# Altium PCB FPAA_minidev.PcbDoc
Units mm, origin at the board's own origin, x right, y up, seen from the top; angles counter-clockwise.
Board outline 152.4 x 101.6 mm, 20 copper layers (F.Cu, F.Mask, B.Cu, B.Mask, In1.Cu, F.SilkS, In2.Cu, B.SilkS, F.Adhes, B.Adhes, F.Paste, B.Paste, Dwgs.User, Cmts.User, Eco1.User, Eco2.User, Edge.Cuts, Margin, B.CrtYd, F.CrtYd); 17 components, 58 nets, 144 pads, 52 vias.
Unrouted connection lines stored in the file: 6.
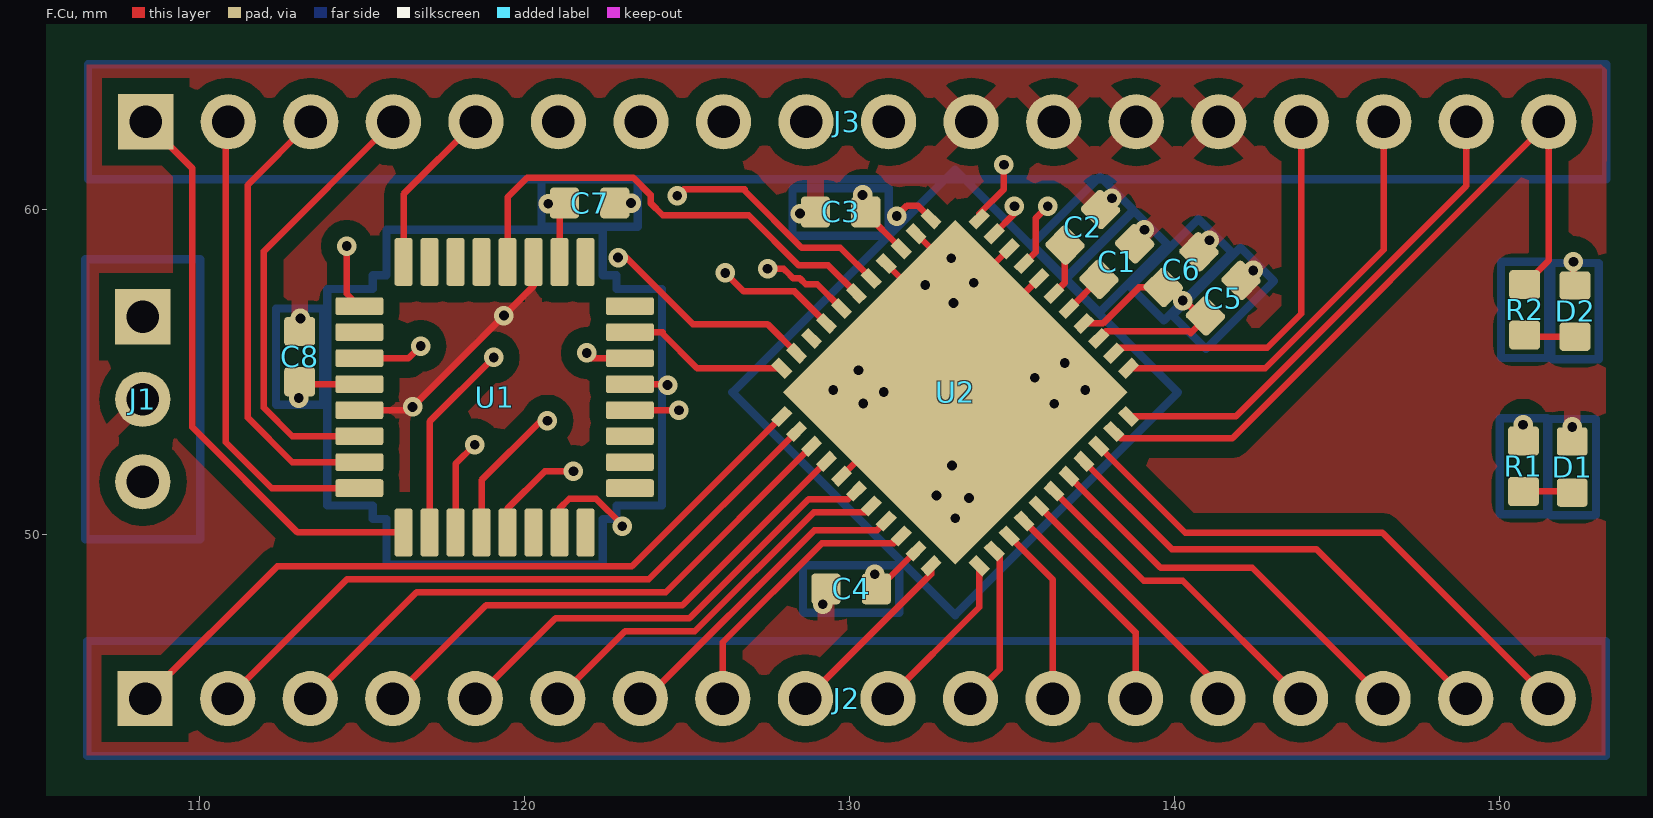
[diagram p0: F.Cu view]
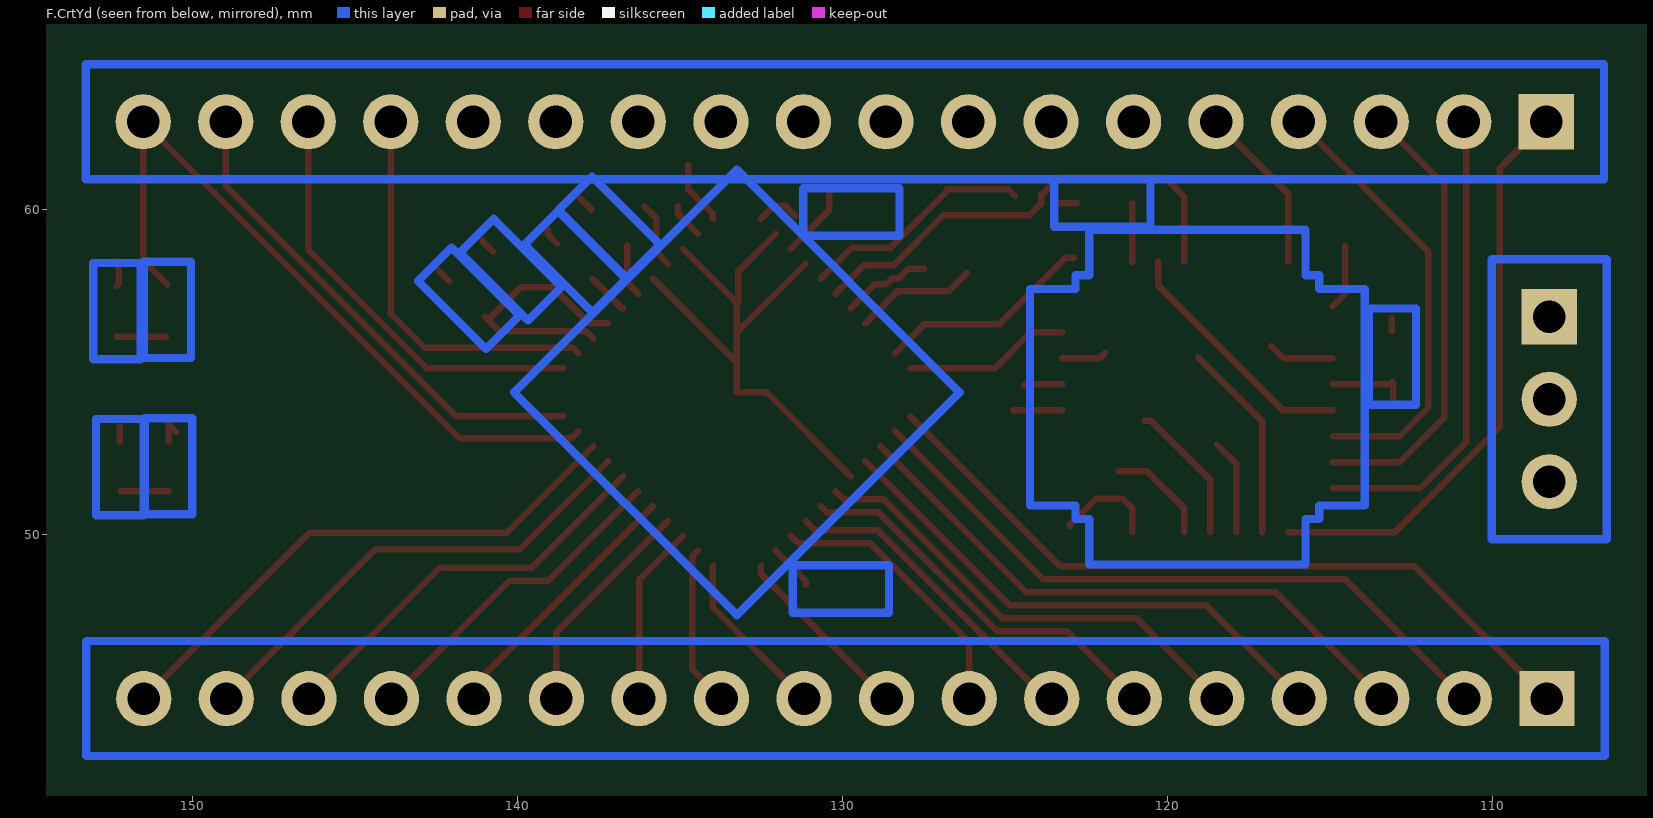
[diagram p1: F.CrtYd view, seen from below]
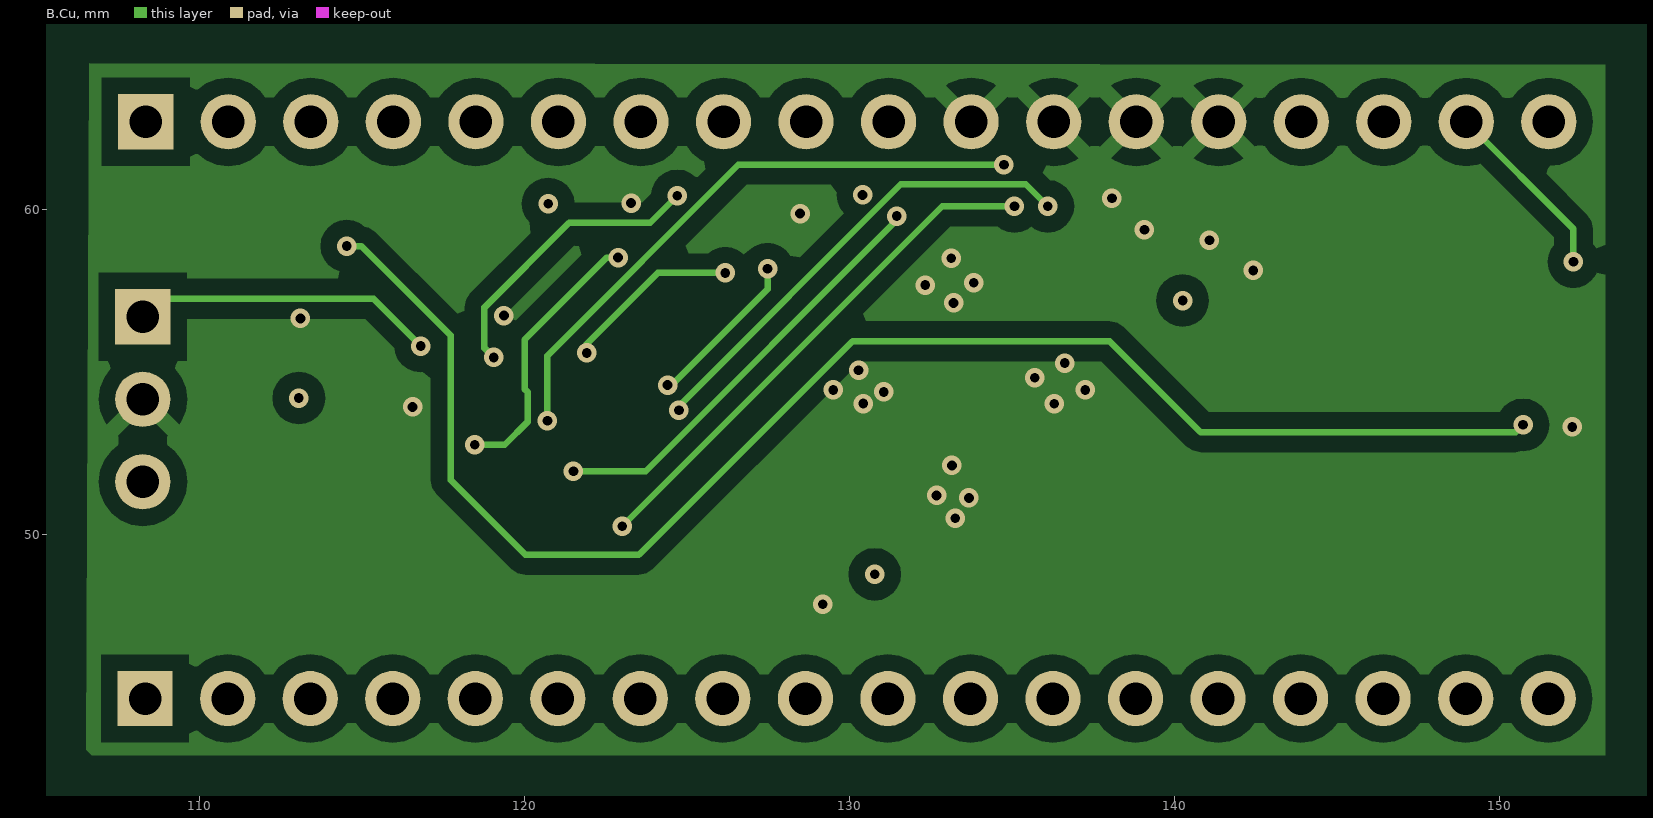
[diagram p2: B.Cu]
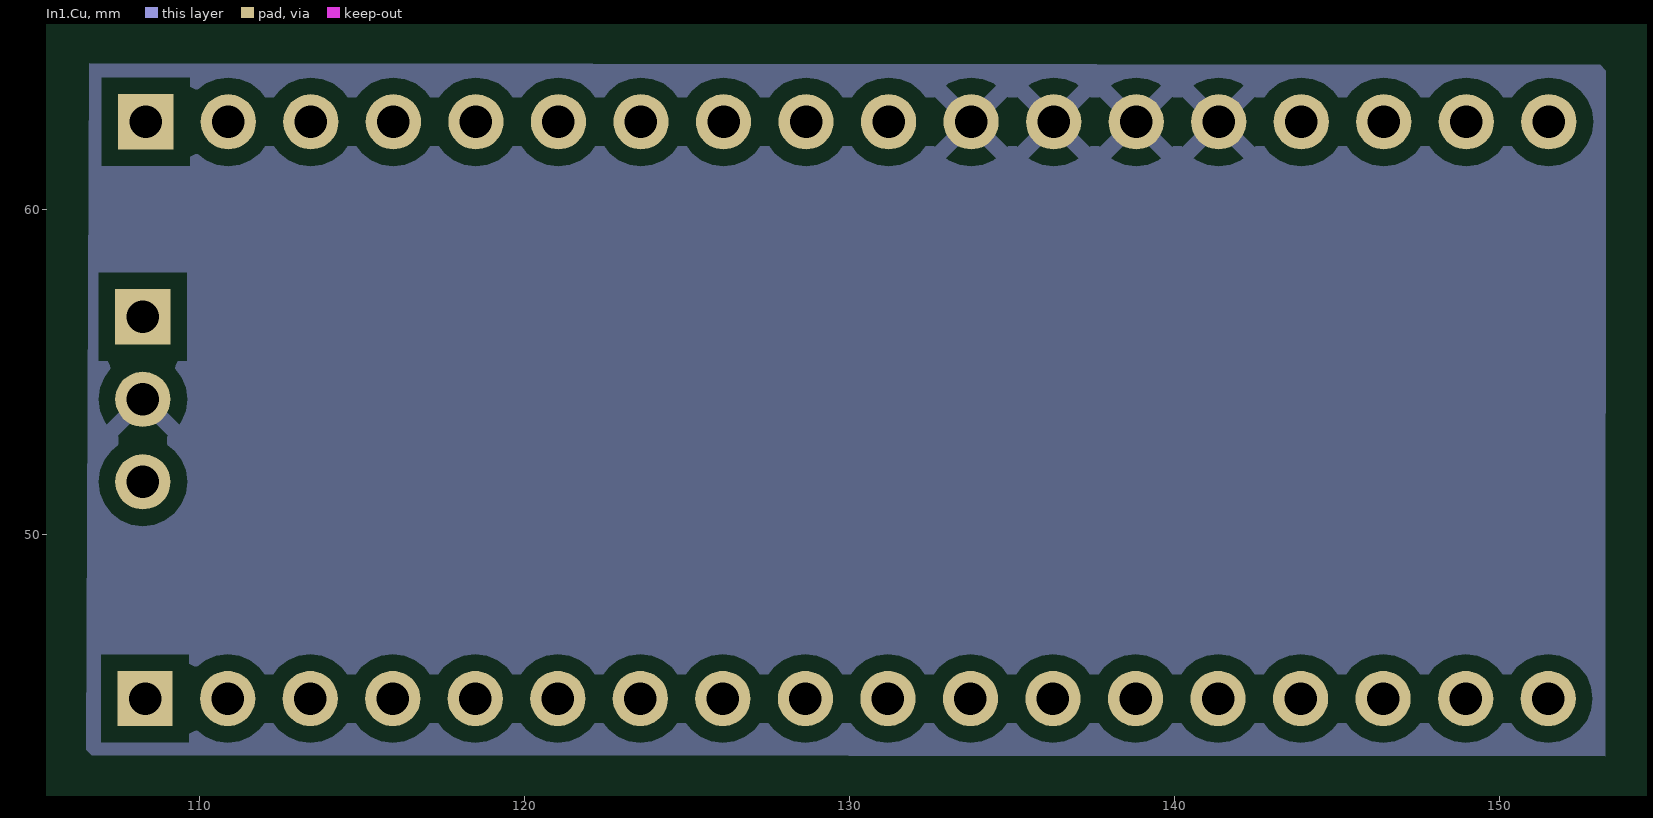
[diagram p3: In1.Cu]
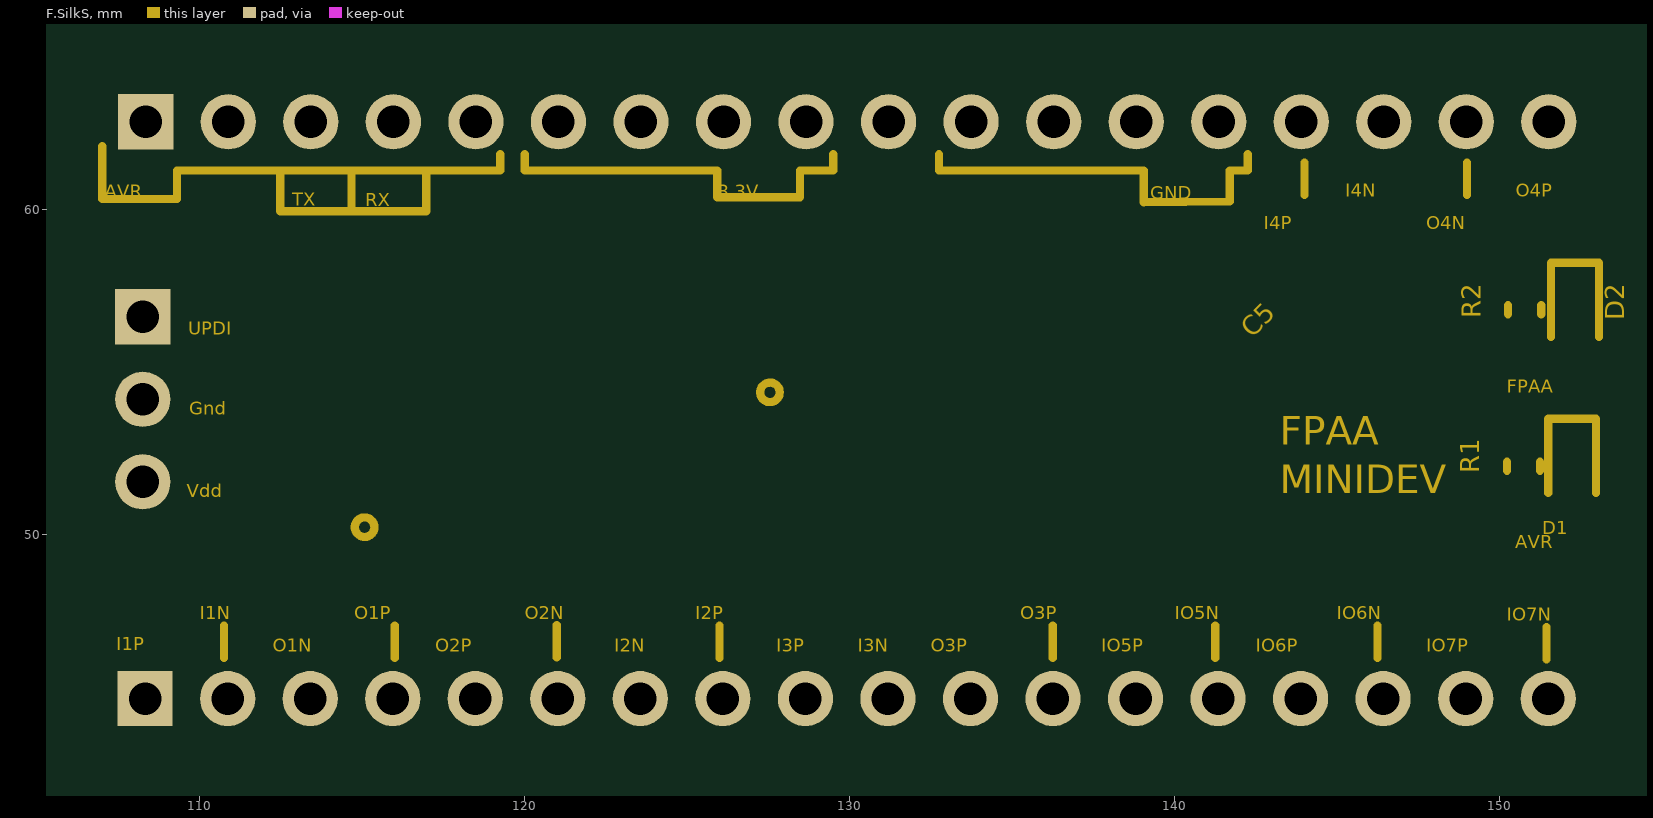
[diagram p4: F.SilkS]
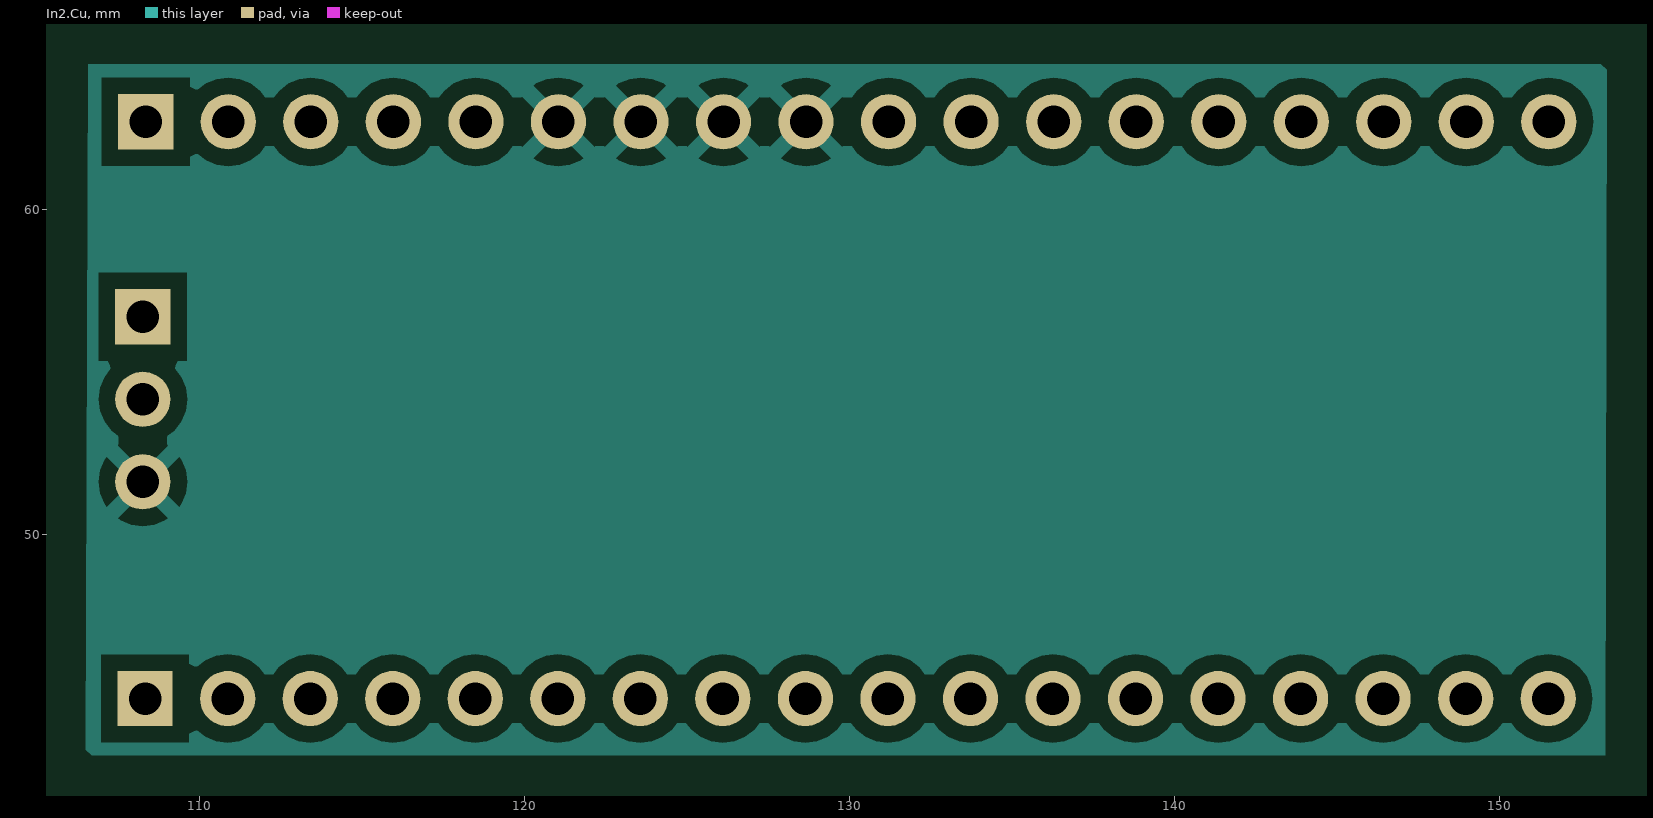
[diagram p5: In2.Cu]
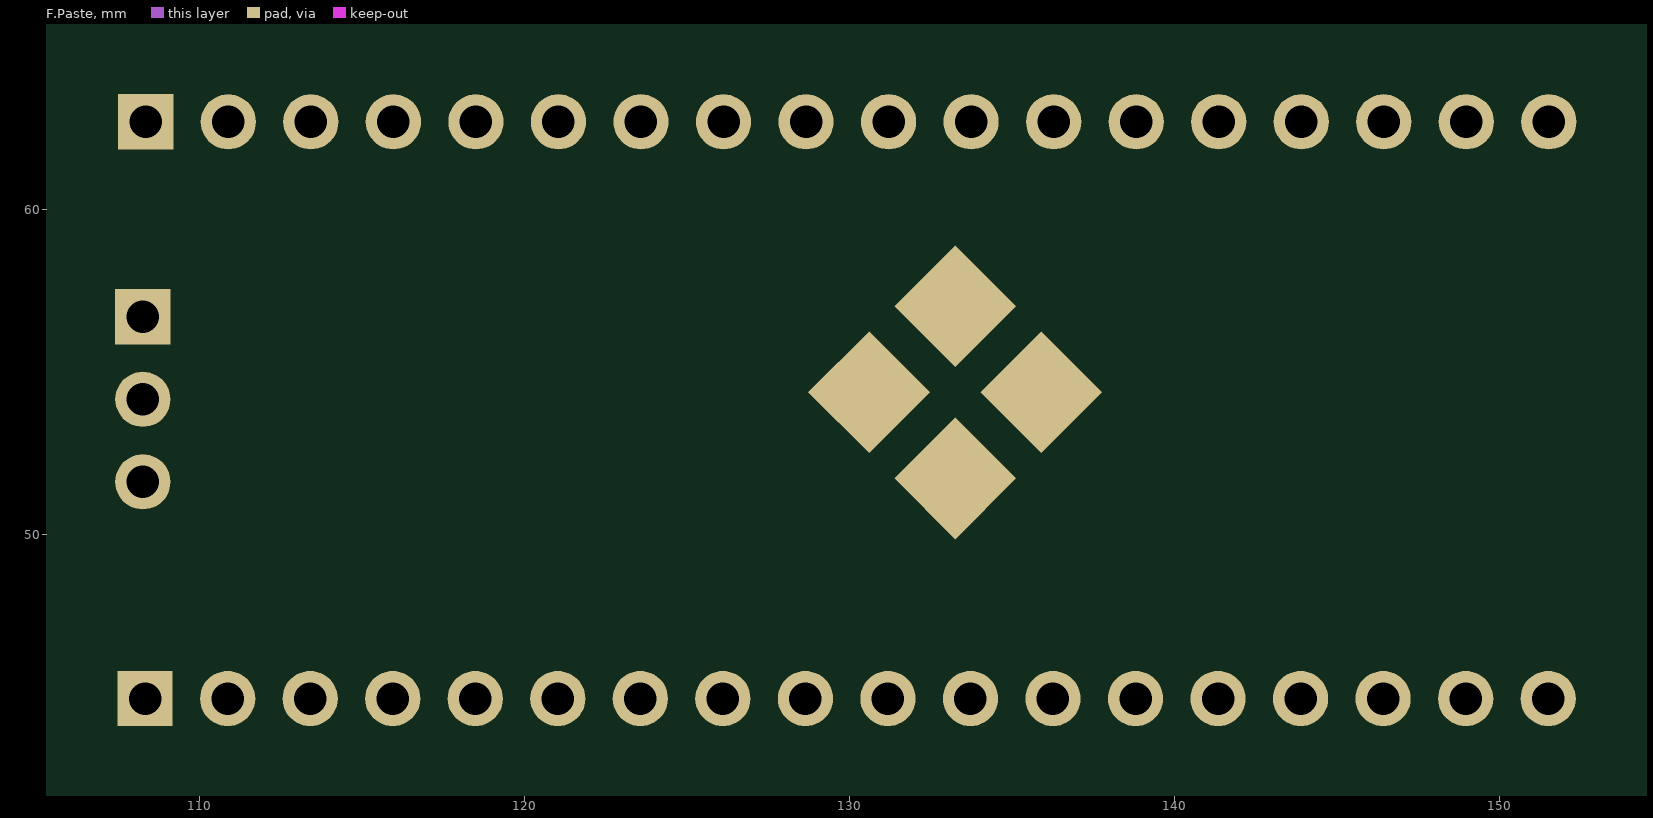
[diagram p6: F.Paste]
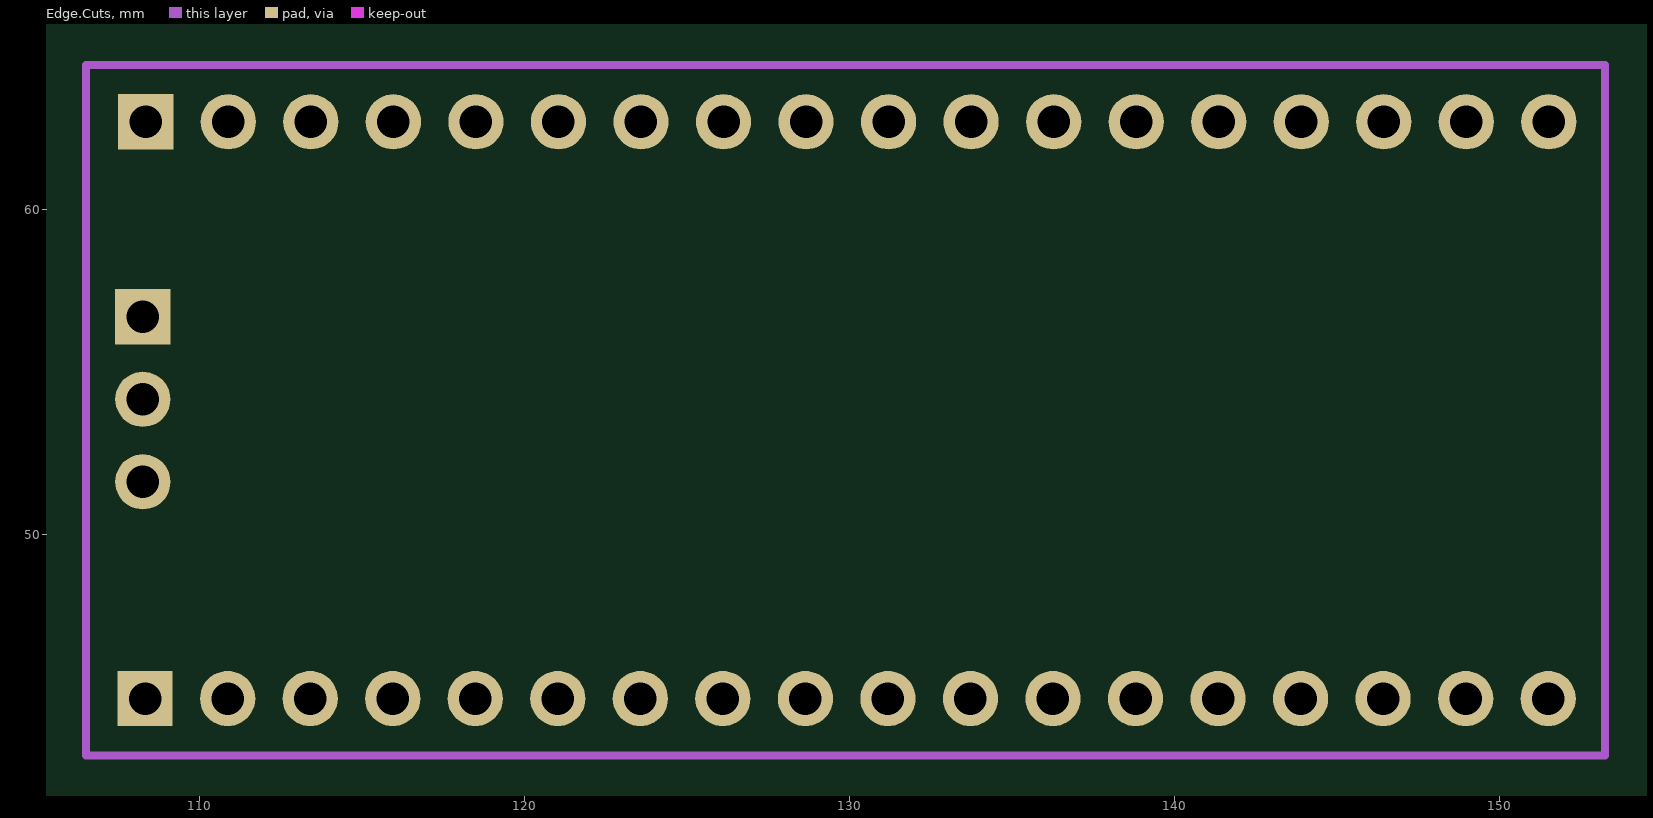
[diagram p7: Edge.Cuts]

## Layer stack, top to bottom
Top Solder: solder mask 0.0102, Solder Resist, Dk 3.5
F.Cu: signal copper 0.0356
Dielectric 1: dielectric 0.32, FR-4, Dk 4.8
F.Mask: signal copper 0.0356
Dielectric2: dielectric 0.32, FR-4, Dk 4.8
B.Cu: signal copper 0.0356
Dielectric3: dielectric 0.32, FR-4, Dk 4.8
B.Mask: signal copper 0.0356
Dielectric4: dielectric 0.32, FR-4, Dk 4.8
In1.Cu: signal copper 0.0356
Dielectric5: dielectric 0.32, FR-4, Dk 4.8
F.SilkS: signal copper 0.0356
Dielectric6: dielectric 0.32, FR-4, Dk 4.8
In2.Cu: signal copper 0.0356
Dielectric7: dielectric 0.32, FR-4, Dk 4.8
B.SilkS: signal copper 0.0356
Dielectric8: dielectric 0.32, FR-4, Dk 4.8
F.Adhes: signal copper 0.0356
Dielectric9: dielectric 0.32, FR-4, Dk 4.8
B.Adhes: signal copper 0.0356
Dielectric10: dielectric 0.32, FR-4, Dk 4.8
F.Paste: signal copper 0.0356
Dielectric11: dielectric 0.32, FR-4, Dk 4.8
B.Paste: signal copper 0.0356
Dielectric12: dielectric 0.32, FR-4, Dk 4.8
Dwgs.User: signal copper 0.0356
Dielectric13: dielectric 0.32, FR-4, Dk 4.8
Cmts.User: signal copper 0.0356
Dielectric14: dielectric 0.32, FR-4, Dk 4.8
Eco1.User: signal copper 0.0356
Dielectric15: dielectric 0.32, FR-4, Dk 4.8
Eco2.User: signal copper 0.0356
Dielectric16: dielectric 0.32, FR-4, Dk 4.8
Edge.Cuts: signal copper 0.0356
Dielectric17: dielectric 0.32, FR-4, Dk 4.8
Margin: signal copper 0.0356
Dielectric18: dielectric 0.32, FR-4, Dk 4.8
B.CrtYd: signal copper 0.0356
Dielectric19: dielectric 0.32, FR-4, Dk 4.8
F.CrtYd: signal copper 0.0356
Bottom Solder: solder mask 0.0102, Solder Resist, Dk 3.5

## Board outline
25.4,25.4 177.8,25.4 177.8,127 25.4,127

## Design rules (kind name [scope] priority, off if disabled: settings)
Clearance "Clearence 0.5_Polygon" [InNamedPolygon('F.Cu-GND') OR InNamedPolygon('B.Cu-GND') OR InNamedPolygon('In1.Cu-GND') OR InNamedPolygon('In2.Cu-+3.3V')] p1: gap=0.5 ignorepadtopadclearanceinfootprint=FALSE
MinimumSolderMaskSliver [All] p1: minsoldermaskwidth=0
PolygonConnect Polygon_In2.Cu-+3.3V_ConnectDirect [IsNamedPolygon('In2.Cu-+3.3V') vs IsVia] p1: connectstyle=Direct reliefconductorwidth=0.254 reliefentries=4 polygonreliefangle="90 Angle" airgapwidth=0.254
PolygonConnect Polygon_In2.Cu-+3.3V_ConnectRelief45 [IsNamedPolygon('In2.Cu-+3.3V') vs (IsThruPin or IsSMTPin) and (PadShape_AllLayers = 'Round')] p2: connectstyle=Relief reliefconductorwidth=0.5 reliefentries=4 polygonreliefangle="45 Angle" airgapwidth=0.5
PolygonConnect Polygon_In2.Cu-+3.3V_ConnectRelief90 [IsNamedPolygon('In2.Cu-+3.3V') vs (IsThruPin or IsSMTPin) and (PadShape_AllLayers <> 'Round')] p3: connectstyle=Relief reliefconductorwidth=0.5 reliefentries=4 polygonreliefangle="90 Angle" airgapwidth=0.5
PolygonConnect Polygon_In1.Cu-GND_ConnectDirect [IsNamedPolygon('In1.Cu-GND') vs IsVia] p4: connectstyle=Direct reliefconductorwidth=0.254 reliefentries=4 polygonreliefangle="90 Angle" airgapwidth=0.254
PolygonConnect Polygon_In1.Cu-GND_ConnectRelief45 [IsNamedPolygon('In1.Cu-GND') vs (IsThruPin or IsSMTPin) and (PadShape_AllLayers = 'Round')] p5: connectstyle=Relief reliefconductorwidth=0.5 reliefentries=4 polygonreliefangle="45 Angle" airgapwidth=0.5
PolygonConnect Polygon_In1.Cu-GND_ConnectRelief90 [IsNamedPolygon('In1.Cu-GND') vs (IsThruPin or IsSMTPin) and (PadShape_AllLayers <> 'Round')] p6: connectstyle=Relief reliefconductorwidth=0.5 reliefentries=4 polygonreliefangle="90 Angle" airgapwidth=0.5
PolygonConnect Polygon_B.Cu-GND_ConnectDirect [IsNamedPolygon('B.Cu-GND') vs IsVia] p7: connectstyle=Direct reliefconductorwidth=0.254 reliefentries=4 polygonreliefangle="90 Angle" airgapwidth=0.254
PolygonConnect Polygon_B.Cu-GND_ConnectRelief45 [IsNamedPolygon('B.Cu-GND') vs (IsThruPin or IsSMTPin) and (PadShape_AllLayers = 'Round')] p8: connectstyle=Relief reliefconductorwidth=0.5 reliefentries=4 polygonreliefangle="45 Angle" airgapwidth=0.5
PolygonConnect Polygon_B.Cu-GND_ConnectRelief90 [IsNamedPolygon('B.Cu-GND') vs (IsThruPin or IsSMTPin) and (PadShape_AllLayers <> 'Round')] p9: connectstyle=Relief reliefconductorwidth=0.5 reliefentries=4 polygonreliefangle="90 Angle" airgapwidth=0.5
PolygonConnect Polygon_F.Cu-GND_ConnectDirect [IsNamedPolygon('F.Cu-GND') vs IsVia] p10: connectstyle=Direct reliefconductorwidth=0.254 reliefentries=4 polygonreliefangle="90 Angle" airgapwidth=0.254
PolygonConnect Polygon_F.Cu-GND_ConnectRelief45 [IsNamedPolygon('F.Cu-GND') vs (IsThruPin or IsSMTPin) and (PadShape_AllLayers = 'Round')] p11: connectstyle=Relief reliefconductorwidth=0.5 reliefentries=4 polygonreliefangle="45 Angle" airgapwidth=0.5
PolygonConnect Polygon_F.Cu-GND_ConnectRelief90 [IsNamedPolygon('F.Cu-GND') vs (IsThruPin or IsSMTPin) and (PadShape_AllLayers <> 'Round')] p12: connectstyle=Relief reliefconductorwidth=0.5 reliefentries=4 polygonreliefangle="90 Angle" airgapwidth=0.5
RoutingVias [All] p1: holewidth=0.711 width=1.27 viastyle="Through Hole" minholewidth=0.711 minwidth=1.27 maxholewidth=0.711 maxwidth=1.27
SilkToSilkClearance [All] p1: silktosilkclearance=0
SilkToSolderMaskClearance [IsPad] p1: minsilkscreentomaskgap=0 clearancetoexposedcopper=TRUE
SolderMaskExpansion [All] p1: expansion=0.102 istentingtop=FALSE
Width [All] p1: maxlimit=10 minlimit=0.254 preferedwidth=0.254 midlayer1_maxwidth=0.254 midlayer3_maxwidth=0.254 midlayer7_maxwidth=0.254 midlayer9_maxwidth=0.254 midlayer11_maxwidth=0.254 midlayer13_maxwidth=0.254 midlayer15_maxwidth=0.254 midlayer17_maxwidth=0.254 midlayer19_maxwidth=0.254 midlayer21_maxwidth=0.254 midlayer23_maxwidth=0.254 midlayer27_maxwidth=0.254 midlayer29_maxwidth=0.254 minimp=50.000000 maximp=50.000000 favimp=50.000000
27 further rules are at their usual default settings.

## Components (designator, comment, footprint, x,y, rotation, side; value= is the part's Value field where it differs from the comment)
C1 "Comment" C_0603_1608Metric#1 138.225,58.4 r45 top value=100n
C2 "Comment" C_0603_1608Metric#1 137.177,59.452 r45 top value=100n
C3 "Comment" C_0603_1608Metric#1 129.725,59.925 r180 top value=100n
C4 "Comment" C_0603_1608Metric#1 130.05,48.325 r0 top value=100n
C5 "Comment" C_0603_1608Metric#1 141.498,57.273 r225 top value=100n
C6 "Comment" C_0603_1608Metric#1 140.202,58.152 r45 top value=100n
C7 "Comment" C_0603_1608Metric#1 122,60.2 r180 top value=100n
C8 "Comment" C_0603_1608Metric#1 113.075,55.475 r90 top value=100n
D1 "Comment" LED_0603_1608Metric 152.239,52.075 r270 top value=LED
D2 "Comment" LED_0603_1608Metric 152.325,56.875 r270 top value=LED
J1 "Comment" PinHeader_1x03_P2.54mm_Vertical 108.25,56.7 r0 top value=Conn_01x03_Pin
J2 "Comment" PinHeader_1x18_P2.54mm_Vertical 108.32,44.95 r90 top value=Conn_01x18_Pin
J3 "Comment" PinHeader_1x18_P2.54mm_Vertical 108.34,62.7 r90 top value=Conn_01x18_Pin
R1 "Comment" C_0603_1608Metric#2 150.739,52.1 r90 top value=330
R2 "Comment" C_0603_1608Metric#2 150.775,56.915 r90 top value=330
U1 "Comment" TQFP-32_7x7mm_P0.8mm 119.075,54.225 r90 top value=AVR32DA32x-xPT
U2 "Comment" QFN-44-1EP_9x9mm_P0.65mm_EP7.5x7.5mm 133.25,54.375 r45 top value=AN231E04

## Footprints (in the part's own frame and the unit in brackets; to place one, negate y for a bottom-side part, rotate by r counter-clockwise, add the part's x,y. Pads: shape width x height; smd on the part's side, far side on the other; paste and mask are expansions set on the pad)
C_0603_1608Metric#1 [mm]
  rrect25% 0.9x0.95 smd paste-0.95 mask-0.95: 1(-0.775,0) 2(0.775,0)
  F.CrtYd lines w0.254: -1.48,0.73 1.48,0.73 1.48,-0.73 -1.48,-0.73 -1.48,0.73
C_0603_1608Metric#2 [mm]
  rrect25% 0.9x0.95 smd paste-0.95 mask-0.95: 1(-0.775,0) 2(0.775,0)
  F.SilkS lines w0.254: -0.141,0.51 0.141,0.51 ; -0.141,-0.51 0.141,-0.51
  F.CrtYd lines w0.254: -1.48,0.73 -1.48,-0.73 1.48,-0.73 1.48,0.73 -1.48,0.73
LED_0603_1608Metric [mm]
  rrect25% 0.875x0.95 smd paste-0.95 mask-0.95: 1(-0.787,0) 2(0.787,0)
  F.SilkS lines w0.254: 0.8,-0.735 -1.485,-0.735 -1.485,0.735 0.8,0.735
  F.CrtYd lines w0.254: 1.48,-0.73 1.48,0.73 -1.48,0.73 -1.48,-0.73 1.48,-0.73
PinHeader_1x03_P2.54mm_Vertical [mm]
  rect 1.7x1.7 hole 1 paste-2539.97 mask-1.7: 1(0,0)
  round 1.7 hole 1 paste-2539.97 mask-1.7: 2(0,-2.54) 3(0,-5.08)
  F.CrtYd lines w0.254: -1.77,-6.85 1.77,-6.85 1.77,1.77 -1.77,1.77 -1.77,-6.85
PinHeader_1x18_P2.54mm_Vertical [mm]
  rect 1.7x1.7 hole 1 paste-2539.97 mask-1.7: 1(0,0)
  round 1.7 hole 1 paste-2539.97 mask-1.7: 2(0,-2.54) 3(0,-5.08) 4(0,-7.62) 5(0,-10.16) 6(0,-12.7) 7(0,-15.24) 8(0,-17.78) 9(0,-20.32) 10(0,-22.86) 11(0,-25.4) 12(0,-27.94) 13(0,-30.48) 14(0,-33.02) 15(0,-35.56) 16(0,-38.1) 17(0,-40.64) 18(0,-43.18)
  F.CrtYd lines w0.254: -1.77,1.78 -1.77,-44.95 1.77,-44.95 1.77,1.78 -1.77,1.78
QFN-44-1EP_9x9mm_P0.65mm_EP7.5x7.5mm [mm]
  rect 0.6x0.33 smd paste-0.6 mask-0.6: 1(-4.3,3.25) 2(-4.3,2.6) 3(-4.3,1.95) 4(-4.3,1.3) 5(-4.3,0.65) 6(-4.3,0) 7(-4.3,-0.65) 8(-4.3,-1.3) 9(-4.3,-1.95) 10(-4.3,-2.6) 11(-4.3,-3.25) 23(4.3,-3.25) 24(4.3,-2.6) 25(4.3,-1.95) 26(4.3,-1.3) 27(4.3,-0.65) 28(4.3,0) 29(4.3,0.65) 30(4.3,1.3) 31(4.3,1.95) 32(4.3,2.6) 33(4.3,3.25)
  rect 0.33x0.6 smd paste-0.6 mask-0.6: 12(-3.25,-4.3) 13(-2.6,-4.3) 14(-1.95,-4.3) 15(-1.3,-4.3) 16(-0.65,-4.3) 17(0,-4.3) 18(0.65,-4.3) 19(1.3,-4.3) 20(1.95,-4.3) 21(2.6,-4.3) 22(3.25,-4.3) 34(3.25,4.3) 35(2.6,4.3) 36(1.95,4.3) 37(1.3,4.3) 38(0.65,4.3) 39(0,4.3) 40(-0.65,4.3) 41(-1.3,4.3) 42(-1.95,4.3) 43(-2.6,4.3) 44(-3.25,4.3)
  rect 7.5x7.5 smd paste-7.5 mask-7.5: 45(0,0)
  rect 2.65x2.65 on Mid13 paste-2.65 mask-2.65: Un1(-1.875,1.875) Un2(-1.875,-1.875) Un3(1.875,1.875) Un4(1.875,-1.875)
  F.CrtYd lines w0.254: -4.85,4.85 -4.85,-4.85 4.85,-4.85 4.85,4.85 -4.85,4.85
TQFP-32_7x7mm_P0.8mm [mm]
  rrect25% 1.475x0.55 smd paste-1.475 mask-1.475: 1(-4.163,2.8) 2(-4.163,2) 3(-4.163,1.2) 4(-4.163,0.4) 5(-4.163,-0.4) 6(-4.163,-1.2) 7(-4.163,-2) 8(-4.163,-2.8) 17(4.163,-2.8) 18(4.163,-2) 19(4.163,-1.2) 20(4.163,-0.4) 21(4.163,0.4) 22(4.163,1.2) 23(4.163,2) 24(4.163,2.8)
  rrect25% 0.55x1.475 smd paste-1.475 mask-1.475: 9(-2.8,-4.163) 10(-2,-4.163) 11(-1.2,-4.163) 12(-0.4,-4.163) 13(0.4,-4.163) 14(1.2,-4.163) 15(2,-4.163) 16(2.8,-4.163) 25(2.8,4.163) 26(2,4.163) 27(1.2,4.163) 28(0.4,4.163) 29(-0.4,4.163) 30(-1.2,4.163) 31(-2,4.163) 32(-2.8,4.163)
  F.CrtYd lines w0.254: -3.33,5.15 3.33,5.15 3.33,3.75 3.75,3.75 3.75,3.33 5.15,3.33 5.15,-3.33 3.75,-3.33 3.75,-3.75 3.33,-3.75 3.33,-5.15 -3.33,-5.15 -3.33,-3.75 -3.75,-3.75 -3.75,-3.33 -5.15,-3.33 -5.15,3.33 -3.75,3.33 -3.75,3.75 -3.33,3.75 -3.33,5.15

## Part data
C1 C2 C3 C4 C5 C6 C7 C8 R1 R2: library part C_0603_1608Metric, "Capacitor SMD 0603 (1608 Metric), square (rectangular) end terminal, IPC-7351 nominal, (Body size source: IPC-SM-782 page 76, https://www.pcb-3d.com/wordpress/wp-content/uploads/ipc-sm-782a_amendment_1_and_2.pdf), generated with kicad-footprint-generator", Datasheet=~
  C1 C2 C3 C4 C5 C6 C7 C8: Description="Unpolarized capacitor", ki_fp_filters=C_*
  R1 R2: Description=Resistor, ki_fp_filters=R_*
D1 D2: library part LED_0603_1608Metric, "LED SMD 0603 (1608 Metric), square (rectangular) end terminal, IPC-7351 nominal, (Body size source: http://www.tortai-tech.com/upload/download/2011102023233369053.pdf), generated with kicad-footprint-generator", Datasheet=~, Description="Light emitting diode", Sim.Pins="1=K 2=A", ki_fp_filters="LED* LED_SMD:* LED_THT:*"
J1: library part PinHeader_1x03_P2.54mm_Vertical, "Through hole straight pin header, 1x03, 2.54mm pitch, single row", Datasheet=~, Description="Generic connector, single row, 01x03, script generated", ki_fp_filters=Connector*:*_1x??_*
J2 J3: library part PinHeader_1x18_P2.54mm_Vertical, "Through hole straight pin header, 1x18, 2.54mm pitch, single row", Datasheet=~, Description="Generic connector, single row, 01x18, script generated", ki_fp_filters=Connector*:*_1x??_*
U1: library part TQFP-32_7x7mm_P0.8mm, "TQFP, 32 Pin (JEDEC MS-026 variation ABA, https://www.jedec.org/document_search?search_api_views_fulltext=MS-026, https://ww1.microchip.com/downloads/en/PackagingSpec/00000049BZ.pdf#page=656), generated with kicad-footprint-generator ipc_gullwing_generator.py", Datasheet=https://ww1.microchip.com/downloads/en/DeviceDoc/AVR32DA28-32-48-Data-Sheet-40002228B.pdf, Description="24MHz, 32kB Flash, 4kB SRAM, EEPROM with Touch Sensing, TQFP-32", ki_fp_filters=TQFP*7x7mm*P0.8mm*
U2: library part QFN-44-1EP_9x9mm_P0.65mm_EP7.5x7.5mm, "44-Lead Plastic Quad Flat, No Lead Package - 9x9 mm Body [QFN]; see section 10.3 of https://www.parallax.com/sites/default/files/downloads/P8X32A-Propeller-Datasheet-v1.4.0_0.pdf", Datasheet=https://www.parallax.com/sites/default/files/downloads/P8X32A-Propeller-Datasheet-v1.4.0_0.pdf, Description="Parallax Propeller 8 core, 32 bit, 80 MHz microcontroller, 3.3VDC, 44-pin QFN", ki_fp_filters=QFN*44*1EP*9x9mm*P0.65mm*

## Via types
v1: diameter 0.6, hole 0.3, F.Cu to B.Cu, tented both sides, 52 vias

## Nets (pads, with @x,y where several pads share a name; then routed paths per layer and width w, separated by ;. In a path a pad name is that pad's centre, name@x,y a point inside that pad or via, vN(x,y) a via of type N, cw(c..) or ccw(c..) an arc to the next point about the centre after c; other vN are vias at no path point)
+3.3V: C3.1 C4.2 C5.2 C6.1 C7.2 C8.1 J1.3 J3.6 J3.7 J3.8 J3.9 U1.18 U1.28 U2.10 U2.25 U2.26 U2.36 | length 16
  F.Cu w0.2: v1(113.05,54.2) 113.05,54.675 C8.1 113.15,54.625 U1.28 ; U1.18 C7.2@121.075,60.2 ; v1(130.4,60.45) 130.4,59.975 130.45,59.925 130.458,59.925 U2.36 ; C4.2@131.125,48.45 131.125,48.573 U2.10 ; U2.26 137.796,56.496 138.904,57.604 C6.1 139.904,57.604 C5.2@140.904,56.604 ; U2.25 137.882,56.249 140.451,56.249 140.5,56.2 C5.2@141,56.7
  other v1: 130.775,48.775 140.25,57.2 120.725,60.175
Aclk: U1.5 U2.34 | length 17.9
  F.Cu w0.2: U1.5 119.475,50.8 120.625,51.95 v1(121.5,51.95) ; v1(131.45,59.801) 131.77,60.121 132.1,60.121 U2.34
  B.Cu w0.2: v1(121.5,51.95) 123.725,51.95 131.45,59.675 v1(131.45,59.801)
GND: C1.2 C2.2 C3.2 C4.1 C5.1 C6.2 C7.1 C8.2 D1.1 J1.2 J3.11 J3.12 J3.13 J3.14 U1.19 U1.29 U2.5 U2.29 U2.31 U2.35 U2.37 U2.45 | length 32.7
  F.Cu w0.2: C8.2 113.1,56.275 v1(113.1,56.65) ; U1.29 116.45,53.825 v1(116.55,53.925) v1(119.362,56.738) 120.275,57.65 U1.19 ; C7.1 v1(123.275,60.2) ; U2.5 132.331,54.375 U2.45 ; U2.37 133.25,56.213 U2.45 ; U2.35 133.2,58.102 v1(133.2,57.125) ; U2.31 133.25,57.133 U2.45 ; U2.29 133.25,55.294 U2.45 ; C2.2 v1(138.075,60.35) ; C1.2 139.075,59.25 v1(139.075,59.375) ; C6.2 141.075,59.025 v1(141.075,59.052) ; C5.1@142.096,57.796 v1(142.425,58.125) ; D1.1 v1(152.239,53.31)
  other v1: 129.175,47.85 133.25,50.5 133.675,51.125 132.675,51.2 133.15,52.125 130.417,54.031 136.3,54.025 131.055,54.385 129.5,54.45 137.25,54.45 135.7,54.825 130.276,55.053 136.625,55.275 132.325,57.675 133.825,57.75 133.125,58.5 128.475,59.875
I1N: J2.2 U2.2 | length 20.9
  F.Cu w0.2: J2.2 114.533,48.623 123.821,48.623 U2.2
I1P: J2.1 U2.1 | length 23.2
  F.Cu w0.2: J2.1 112.394,49.024 123.303,49.024 U2.1
I2N: J2.7 U2.8 | length 9.8
  F.Cu w0.2: J2.7 123.734,44.95 128.917,50.133 130.846,50.133 U2.8
I2P: J2.8 U2.9 | length 8.6
  F.Cu w0.2: J2.8 126.1,46.682 129.15,49.732 131.365,49.732 U2.9
I3N: J2.10 U2.12 | length 5.3
  F.Cu w0.2: J2.10 133.992,47.762 U2.12
I3P: J2.9 U2.11 | length 5.7
  F.Cu w0.2: J2.9 128.675,44.95 132.508,48.782 U2.11
I4N: J3.16 U2.23 | length 13.3
  F.Cu w0.2: U2.23 142.792,55.117 146.44,58.765 J3.16
I4P: J3.15 U2.24 | length 12.2
  F.Cu w0.2: U2.24 138.299,55.747 142.855,55.747 143.9,56.792 J3.15
IO1: J3.1 U1.1 | length 17.8
  F.Cu w0.2: J3.1 109.775,61.265 109.775,53.3 113.012,50.063 U1.1
IO2: J3.2 U1.32 | length 14.6
  F.Cu w0.2: J3.2 110.8,62.62 110.8,52.842 112.217,51.425 U1.32
IO3: J3.3 U1.31 | length 13.9
  F.Cu w0.2: J3.3 111.475,60.755 111.475,53.6 112.85,52.225 U1.31
IO4: J3.4 U1.30 | length 13.8
  F.Cu w0.2: U1.30 112.85,53.025 111.975,53.9 111.975,58.715 J3.4
IO5: J3.5 U1.24 | length 5.2
  F.Cu w0.2: U1.24 116.275,60.475 J3.5
IO5N: J2.14 U2.16 | length 8.2
  F.Cu w0.2: U2.16 141.34,45.366 J2.14
IO5P: J2.13 U2.15 | length 6.9
  F.Cu w0.2: U2.15 138.8,46.987 J2.13
IO6N: J2.16 U2.18 | length 12.5
  F.Cu w0.2: U2.18 139.569,48.975 142.395,48.975 J2.16
IO6P: J2.15 U2.17 | length 10.2
  F.Cu w0.2: U2.17 139.05,48.575 140.255,48.575 J2.15
IO7N: J2.18 U2.20 | length 17
  F.Cu w0.2: U2.20 140.333,50.05 146.4,50.05 J2.18
IO7P: J2.17 U2.19 | length 14.8
  F.Cu w0.2: U2.19 139.913,49.55 144.36,49.55 J2.17
Lccb: U1.20 U2.39 | length 14.6
  F.Cu w0.2: U1.20 119.475,60.375 120.076,60.976 123.349,60.976 123.876,60.449 123.876,60.199 124.251,59.824 126.893,59.824 128.435,58.282 129.343,58.282 U2.39
Net-(D1-A): D1.2 R1.1 | length 1.5
  F.Cu w0.2: R1.1 D1.2@152.211,51.325
Net-(D2-A): D2.2 R2.1 | length 1.5
  F.Cu w0.2: R2.1@150.828,56.088 D2.2
Net-(J1-Pin_1): J1.1 U1.27 | length 11.4
  F.Cu w0.2: U1.27 116.425,55.425 v1(116.8,55.8)
  B.Cu w0.2: J1.1 108.801,57.251 115.349,57.251 v1(116.8,55.8)
Net-(U1-PA4): U1.2 U2.38 | length 22.4
  F.Cu w0.2: U1.2 117.075,53.475 v1(119.05,55.45) ; v1(124.7,60.425) 124.9,60.625 126.775,60.625 ; 126.775,60.575 128.522,58.828 129.716,58.828 U2.38
  B.Cu w0.2: v1(119.05,55.45) 118.761,55.739 118.761,56.986 121.368,59.593 123.868,59.593 v1(124.7,60.425)
Net-(U1-PA5): U1.3 U2.43 | length 18.1
  F.Cu w0.2: U1.3 117.875,52.175 v1(118.462,52.763) ; v1(122.876,58.524) 123.126,58.524 125.175,56.475 127.473,56.475 U2.43
  B.Cu w0.2: v1(118.462,52.763) 119.388,52.763 120.101,53.476 120.101,54.374 119.999,54.476 119.999,55.996 122.527,58.524 v1(122.876,58.524)
Net-(U1-PC1): U1.7 U2.32 | length 20.4
  F.Cu w0.2: U1.7 121.075,50.8 121.376,51.101 122.198,51.101 123,50.299 v1(123,50.25) ; U2.32 135.075,59.877 v1(135.075,60.1)
  B.Cu w0.2: v1(123,50.25) 132.85,60.1 v1(135.075,60.1)
Net-(U1-PD2): U1.12 U2.30 | length 18.2
  F.Cu w0.2: U1.12 v1(124.75,53.825) ; U2.30 135.725,58.688 135.725,59.725 v1(136.1,60.1)
  B.Cu w0.2: v1(124.75,53.825) 124.75,53.95 131.575,60.775 135.425,60.775 v1(136.1,60.1)
Net-(U1-PD3): U1.13 U2.40 | length 8.9
  F.Cu w0.2: U1.13 124.375,54.625 v1(124.4,54.6) ; v1(127.475,58.175) 127.969,58.175 128.044,58.1 128.05,58.1 128.269,57.881 128.473,57.881 128.654,57.7 129.006,57.7 U2.40
  B.Cu w0.2: v1(124.4,54.6) 124.525,54.6 127.475,57.55 v1(127.475,58.175)
Net-(U1-PD4): U1.14 U2.41 | length 10.6
  F.Cu w0.2: v1(121.912,55.588) 122.075,55.425 U1.14 ; v1(126.175,58.05) 126.745,57.48 128.307,57.48 U2.41
  B.Cu w0.2: v1(121.912,55.588) 121.912,55.862 124.1,58.05 v1(126.175,58.05)
Net-(U1-PD5): U1.15 U2.44 | length 5.2
  F.Cu w0.2: U1.15 124.25,56.225 124.25,56.175 125.308,55.117 U2.44
Net-(U1-PF5): R1.2 U1.25 | length 49.6
  F.Cu w0.2: v1(114.525,58.875) 114.525,57.413 U1.25 ; R1.2@150.5,53.15 v1(150.725,53.375) 150.725,52.889 R1.2
  B.Cu w0.2: v1(114.525,58.875) 114.975,58.875 117.724,56.126 117.724,51.676 120.026,49.374 123.516,49.374 130.091,55.949 138.001,55.949 140.8,53.15 150.5,53.15 v1(150.725,53.375)
Net-(U2-VMR): C1.1 U2.27 | length 1.3
  F.Cu w0.2: U2.27 136.781,56.956 C1.1
Net-(U2-VREFN): C2.1 U2.28 | length 1.6
  F.Cu w0.2: U2.28 136.629,57.754 C2.1
O1N: J2.3 U2.3 | length 18.6
  F.Cu w0.2: J2.3 116.672,48.222 124.339,48.222 U2.3
O1P: J2.4 U2.4 | length 16.4
  F.Cu w0.2: J2.4 118.811,47.821 124.858,47.821 U2.4
O2N: J2.6 U2.7 | length 12.1
  F.Cu w0.2: J2.6 123.089,47.019 125.236,47.019 128.904,50.687 130.481,50.687 U2.7
O2P: J2.5 U2.6 | length 14.4
  F.Cu w0.2: J2.5 120.95,47.42 125.07,47.42 128.737,51.088 129.963,51.088 U2.6
O3N: J2.11 U2.13 | length 5
  F.Cu w0.2: J2.11 134.622,45.852 134.622,49.326 U2.13
O3P: J2.12 U2.14 | length 5.6
  F.Cu w0.2: U2.14 136.26,48.607 J2.12
O4N: D2.1 J3.17 U2.22 | length 21.7
  F.Cu w0.2: U2.22 141.885,53.633 148.98,60.727 J3.17 ; v1(152.275,58.39) 152.275,57.713 D2.1
  B.Cu w0.2: J3.17 152.275,59.405 v1(152.275,58.39)
O4P: J3.18 R2.2 U2.21 | length 22.8
  F.Cu w0.2: U2.21 138.341,52.961 141.781,52.961 J3.18 151.52,58.435 R2.2
Sclk: U1.4 U2.33 | length 24.9
  F.Cu w0.2: U1.4 118.675,51.675 120.5,53.5 v1(120.701,53.5) ; U2.33 133.992,59.867 134.75,60.625 v1(134.75,61.375)
  B.Cu w0.2: v1(120.701,53.5) 120.701,55.5 126.576,61.375 v1(134.75,61.375)
unconnected-(J3-Pin_10-Pad10): J3.10
unconnected-(U1-PC0-Pad6): U1.6
unconnected-(U1-PC2-Pad8): U1.8
unconnected-(U1-PC3-Pad9): U1.9
unconnected-(U1-PD0-Pad10): U1.10
unconnected-(U1-PD1-Pad11): U1.11
unconnected-(U1-PD6-Pad16): U1.16
unconnected-(U1-PF2-Pad22): U1.22
unconnected-(U1-PF3-Pad23): U1.23
unconnected-(U1-VREFA{slash}PD7-Pad17): U1.17
unconnected-(U1-XTAL32K2{slash}PF1-Pad21): U1.21
unconnected-(U1-{\R\E\S\E\T\}\{\s\l\a\s\h\}\P\F\6\-\P\a\d\2\6\)\: U1.26
unconnected-(U2-MEMCLK-Pad42): U2.42
pads on no net: U2.Un1 U2.Un2 U2.Un3 U2.Un4
copper on no net: | length 198.4
  F.SilkS w0.254: 107,61.95 107,61.2 107,60.325 109.3,60.325 109.3,61.2 119.25,61.2 ; 110.75,46.2 110.75,47.2 ; 112.475,61.2 112.475,59.95 116.975,59.95 116.975,61.2 ; 114.675,59.95 114.675,61.2 ; 116,46.2 116,47.2 ; 120,61.7 120,61.2 125.925,61.2 125.925,60.375 128.475,60.375 128.475,61.2 129.5,61.2 129.5,61.7 ; 120.987,46.211 120.987,47.211 ; 126,46.2 126,47.2 ; 132.75,61.7 132.75,61.2 139.05,61.2 139.05,60.225 141.7,60.25 141.7,61.2 142.25,61.2 142.25,61.7 ; 136.25,46.2 136.25,47.2 ; 141.25,46.2 141.25,47.2 ; 144,60.45 144,61.45 ; 146.25,46.2 146.25,47.2 ; 149,60.45 149,61.45 ; 151.45,46.15 151.45,47.15 ; 119.25,61.2 119.25,61.7 119.25,61.2 ; 115.376,50.225 ccw(c115.075,50.225) 115.376,50.225 ; 127.851,54.375 ccw(c127.55,54.375) 127.851,54.375
  Edge.Cuts w0.254: 106.5,43.2 153.25,43.2 153.25,64.45 106.5,64.45 106.5,43.2

## Polygon pours and split planes (outlines as drawn)
GND on F.Cu "F.Cu-GND" (solid, remove dead copper, pour order 0): 106.525,64.45 153.3,64.475 153.25,43.2 106.525,43.2
GND on B.Cu "B.Cu-GND" (solid, remove dead copper, pour order 3): 106.6,64.5 153.25,64.45 153.25,43.2 106.5,43.2
GND on In1.Cu "In1.Cu-GND" (solid, remove dead copper, pour order 1): 106.6,64.5 153.275,64.45 153.25,43.175 106.5,43.2
+3.3V on In2.Cu "In2.Cu-+3.3V" (solid, remove dead copper, pour order 2): 106.575,64.475 153.3,64.475 153.25,43.2 106.5,43.2

## Other copper
F.SilkS:
  text "I4N" at 145.25,60.254 h0.7
  text "O4P" at 150.5,60.251 h0.7
  text "AVR" at 107.075,60.227 h0.7
  text "3.3V" at 125.95,60.225 h0.7
  text "GND" at 139.25,60.176 h0.7
  text "TX" at 112.85,59.981 h0.7
  text "RX" at 115.1,59.956 h0.7
  text "I4P" at 142.75,59.254 h0.7
  text "O4N" at 147.75,59.251 h0.7
  text "UPDI" at 109.65,56.003 h0.7
  text "FPAA" at 150.225,54.23 h0.7
  text "Gnd" at 109.675,53.551 h0.7
  text "Vdd" at 109.6,51.003 h0.7
  text "FPAA / MINIDEV" at 143.237,50.977 h1.5
  text "AVR" at 150.489,49.442 h0.7
  text "I1N" at 110,47.256 h0.7
  text "O1P" at 114.75,47.251 h0.7
  text "O2N" at 120,47.251 h0.7
  text "I2P" at 125.25,47.254 h0.7
  text "O3P" at 135.25,47.25 h0.7
  text "IO5N" at 140,47.25 h0.7
  text "IO6N" at 145,47.25 h0.7
  text "IO7N" at 150.225,47.2 h0.7
  text "I1P" at 107.425,46.306 h0.7
  text "O1N" at 112.25,46.251 h0.7
  text "O2P" at 117.25,46.251 h0.7
  text "I2N" at 122.75,46.254 h0.7
  text "I3P" at 127.75,46.25 h0.7
  text "I3N" at 130.25,46.25 h0.7
  text "O3P" at 132.5,46.25 h0.7
  text "IO5P" at 137.75,46.25 h0.7
  text "IO6P" at 142.5,46.25 h0.7
  text "IO7P" at 147.75,46.25 h0.7